# Altium PCB 电极转接板.PcbDoc
Units mil, origin at the board's own origin, x right, y up, seen from the top; angles counter-clockwise.
Board outline 1929.13 x 1259.84 mil, 2 copper layers (Top Layer, Bottom Layer); 2 components, 10 nets, 23 pads, 0 vias.
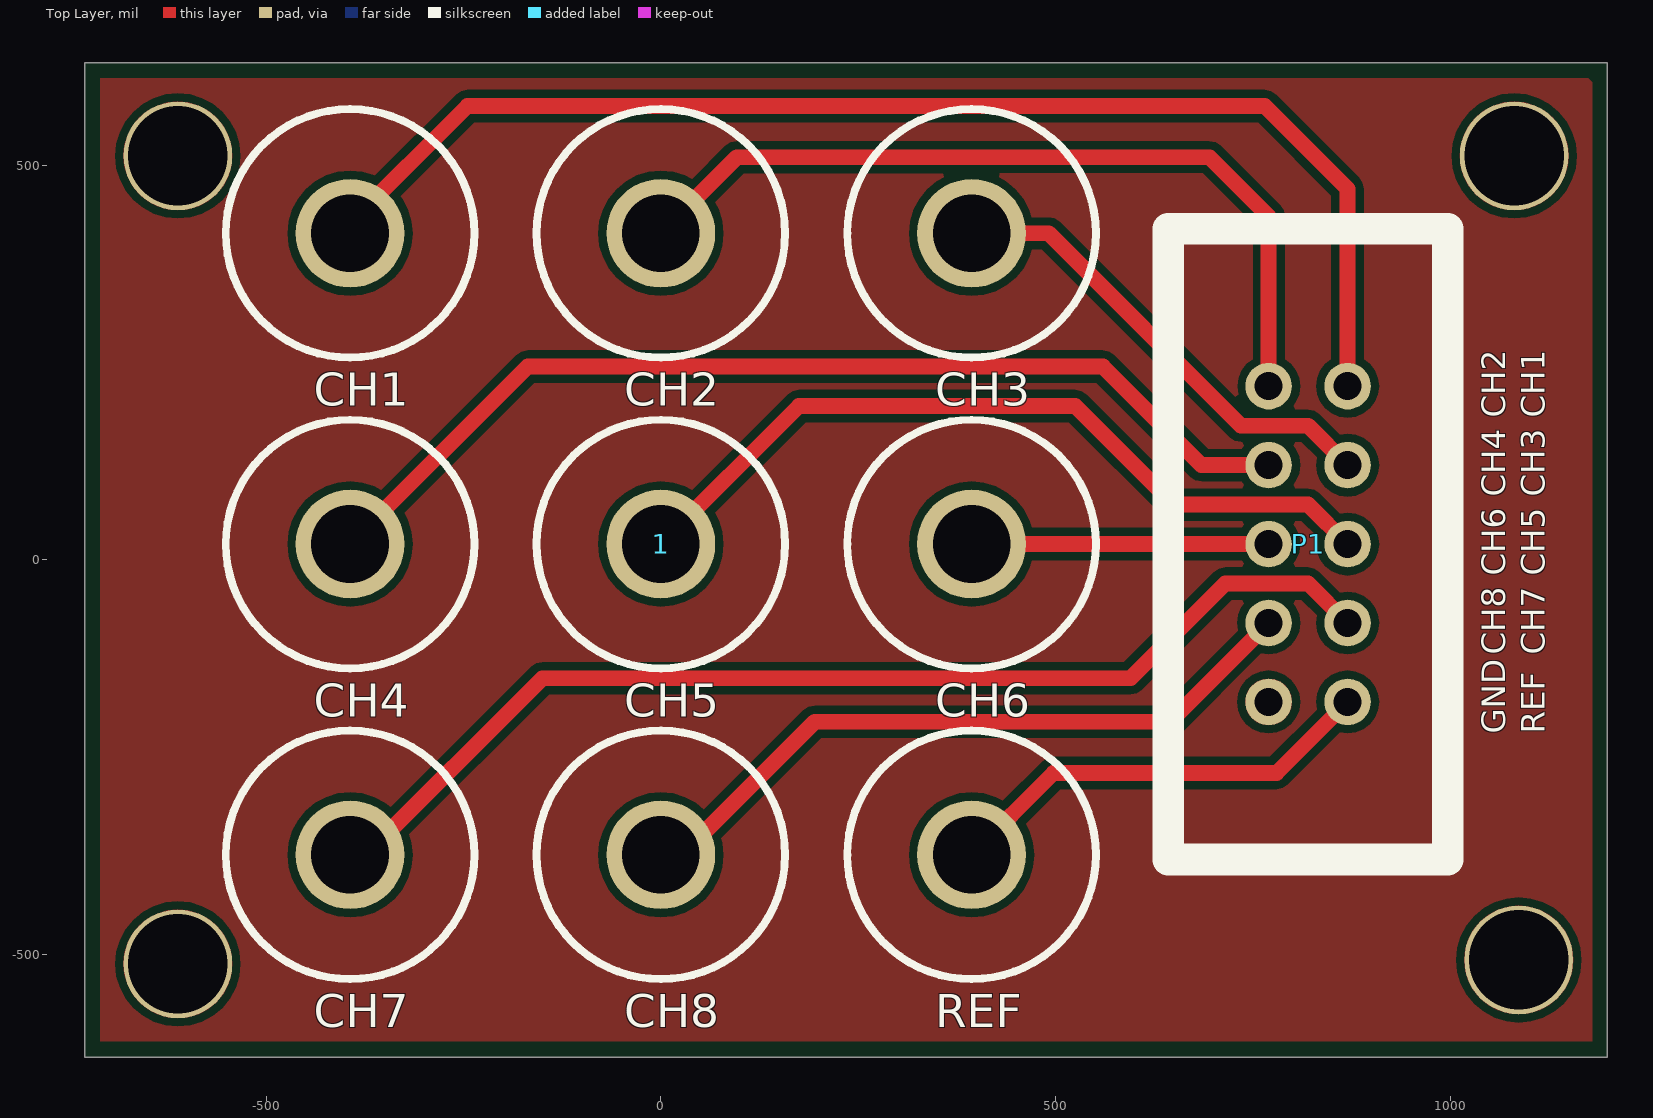
[diagram p0: Top Layer view]
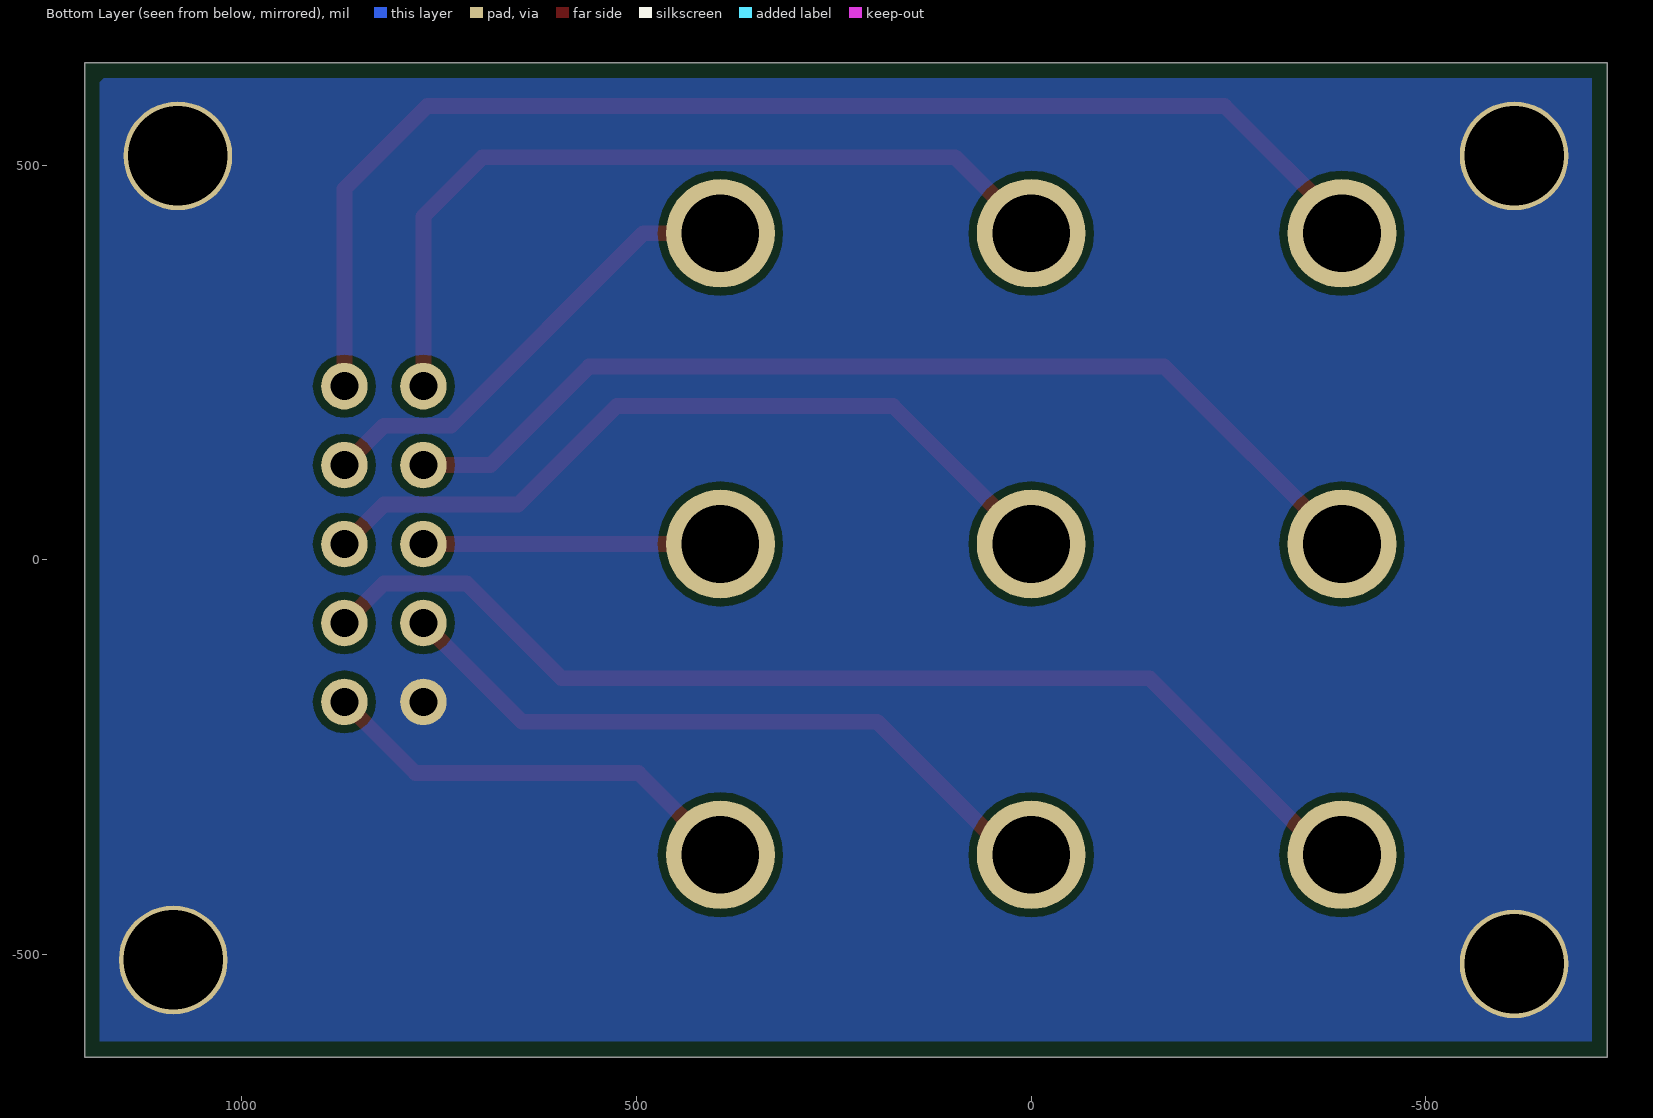
[diagram p1: Bottom Layer view, seen from below]

## Layer stack, top to bottom
Top Solder: solder mask 0.4, Solder Resist, Dk 3.5
Top Layer: signal copper 1.4
Dielectric 1: dielectric 12.6, FR-4, Dk 4.8
Bottom Layer: signal copper 1.4
Bottom Solder: solder mask 0.4, Solder Resist, Dk 3.5

## Board outline
-730,-629.92 1199.13,-629.92 1199.13,629.92 -730,629.92

## Design rules (kind name [scope] priority, off if disabled: settings)
Clearance [All] p1: gap=10 ignorepadtopadclearanceinfootprint=FALSE except(0: Arc-Hole Track-Hole SMDPad-Hole THPad-Hole Via-Hole Fill-Hole Poly-Hole Region-Hole Text-Hole)
PlaneConnect [All] p1: planeconnectstyle=Direct reliefexpansion=20 reliefentries=4 reliefconductorwidth=10 reliefairgap=10
PolygonConnect [All] p1: connectstyle=Direct reliefconductorwidth=10 reliefentries=4 polygonreliefangle="90 Angle" airgapwidth=10
RoutingVias [All] p1: holewidth=28 width=50 viastyle="Through Hole" minholewidth=28 minwidth=50 maxholewidth=28 maxwidth=50
SolderMaskExpansion [All] p1: expansion=4
Width [All] p1: maxlimit=30 minlimit=6 preferedwidth=20
29 further rules are at their usual default settings.

## Components (designator, comment, footprint, x,y, rotation, side; value= is the part's Value field where it differs from the comment)
1 "电极接口" 电极接口 -393.7,413.7 r0 top
P1 "Header 5X2" 牛角直插10P 820,20 r180 top

## Footprints (in the part's own frame and the unit in brackets; to place one, negate y for a bottom-side part, rotate by r counter-clockwise, add the part's x,y. Pads: shape width x height; smd on the part's side, far side on the other; paste and mask are expansions set on the pad)
牛角直插10P [mm]
  round 1.5 hole 0.9: 1(-1.27,-5.08) 2(1.27,-5.08) 3(-1.27,-2.54) 4(1.27,-2.54) 5(-1.27,0) 6(1.27,0) 7(-1.27,2.54) 8(1.27,2.54) 9(-1.27,5.08) 10(1.27,5.08)
  silkscreen extent -4.5,-10.15 4.5,10.15
电极接口 [mm]
  round 3.5 hole 2.5: 1(0,0) 2(10,0) 3(20,0) 4(0,-10) 5(10,-10) 6(20,-10) 7(0,-20) 8(10,-20) 9(20,-20)
  silkscreen extent -4,-24 24,4

## Part data
P1: "Header, 5-Pin, Dual row", LatestRevisionDate=17-Jul-2002, LatestRevisionNote="Re-released for DXP Platform.", Publisher="Altium Limited"

## Free pads (board coordinates)
  round 137.8 hole 125.98: 11(-611.89,-511.81) 11(-611.89,511.81) 11(1081.02,511.81) 11(1086.89,-506.89)

## Nets (pads, with @x,y where several pads share a name; then routed paths per layer and width w, separated by ;. In a path a pad name is that pad's centre, name@x,y a point inside that pad or via, vN(x,y) a via of type N, cw(c..) or ccw(c..) an arc to the next point about the centre after c; other vN are vias at no path point)
GND: P1.10 pad.11
Net1_1: 1.1 P1.1 | length 1631.4
  Top Layer w20: 1.1 -393.7,426.3 -245,575 765,575 870,470 P1.1
Net1_2: 1.2 P1.2 | length 1056
  Top Layer w20: 1.2 96.3,510 695,510 770,435 P1.2
Net1_3: 1.3 P1.3 | length 598
  Top Layer w20: 1.3 491.3,413.7 735,170 820,170 P1.3
Net1_4: 1.4 P1.4 | length 1308.7
  Top Layer w20: 1.4 -168.7,245 560,245 685,120 P1.4
Net1_5: 1.5 P1.5 | length 1015
  Top Layer w20: 1.5 175,195 525,195 650,70 820,70 P1.5
Net1_6: 1.6 P1.6 | length 376.3
  Top Layer w20: 1.6 P1.6
Net1_7: 1.7 P1.7 | length 1426.8
  Top Layer w20: 1.7 -373.7,-373.7 -150,-150 595,-150 715,-30 820,-30 P1.7
Net1_8: 1.8 P1.8 | length 891.7
  Top Layer w20: 1.8 26.3,-373.7 195,-205 645,-205 P1.8
Net1_9: 1.9 P1.9 | length 556.5
  Top Layer w20: 1.9 497.4,-270 780,-270 P1.9

## Polygon pours and split planes (outlines as drawn)
GND on Top Layer (solid, pour order 2): -710,610 -710,-610 1180,-610 1180,605 1175,610
no net on Top Layer (solid, pour order 0): -710,610 -710,-610 1180,-610 1180,605 1175,610
GND on Bottom Layer (solid, pour order 4): -710,610 -710,-610 1180,-610 1180,605 1175,610

## Silkscreen, mask and mechanical layers (free items; w line width, h text height)
Top Overlay:
  text "CH1" at -440,195 h42
  text "CH2" at -46.3,195 h42
  text "CH3" at 347.4,195 h42
  text "CH2" at 1070,180 h30 r90
  text "CH1" at 1120,180 h30 r90
  text "CH4" at 1070,80 h30 r90
  text "CH3" at 1120,80 h30 r90
  text "CH6" at 1070,-20 h30 r90
  text "CH5" at 1120,-20 h30 r90
  text "CH8" at 1070,-120 h30 r90
  text "CH7" at 1120,-120 h30 r90
  text "CH4" at -440,-198.7 h42
  text "CH5" at -46.3,-198.7 h42
  text "CH6" at 347.4,-198.7 h42
  text "GND" at 1070,-220 h30 r90
  text "REF" at 1120,-220 h30 r90
  text "CH7" at -440,-592.4 h42
  text "CH8" at -46.3,-592.4 h42
  text "REF" at 347.4,-592.4 h42
Mechanical 1:
  the board outline again, w40